# Altium PCB Current Sensor.PcbDoc
Units mil, origin at the board's own origin, x right, y up, seen from the top; angles counter-clockwise.
Board outline 1331 x 1211.8 mil, 4 copper layers (Top Layer, GND, 5V, Bottom Layer), stack 26.556 mil thick; 31 components, 12 nets, 73 pads, 40 vias.
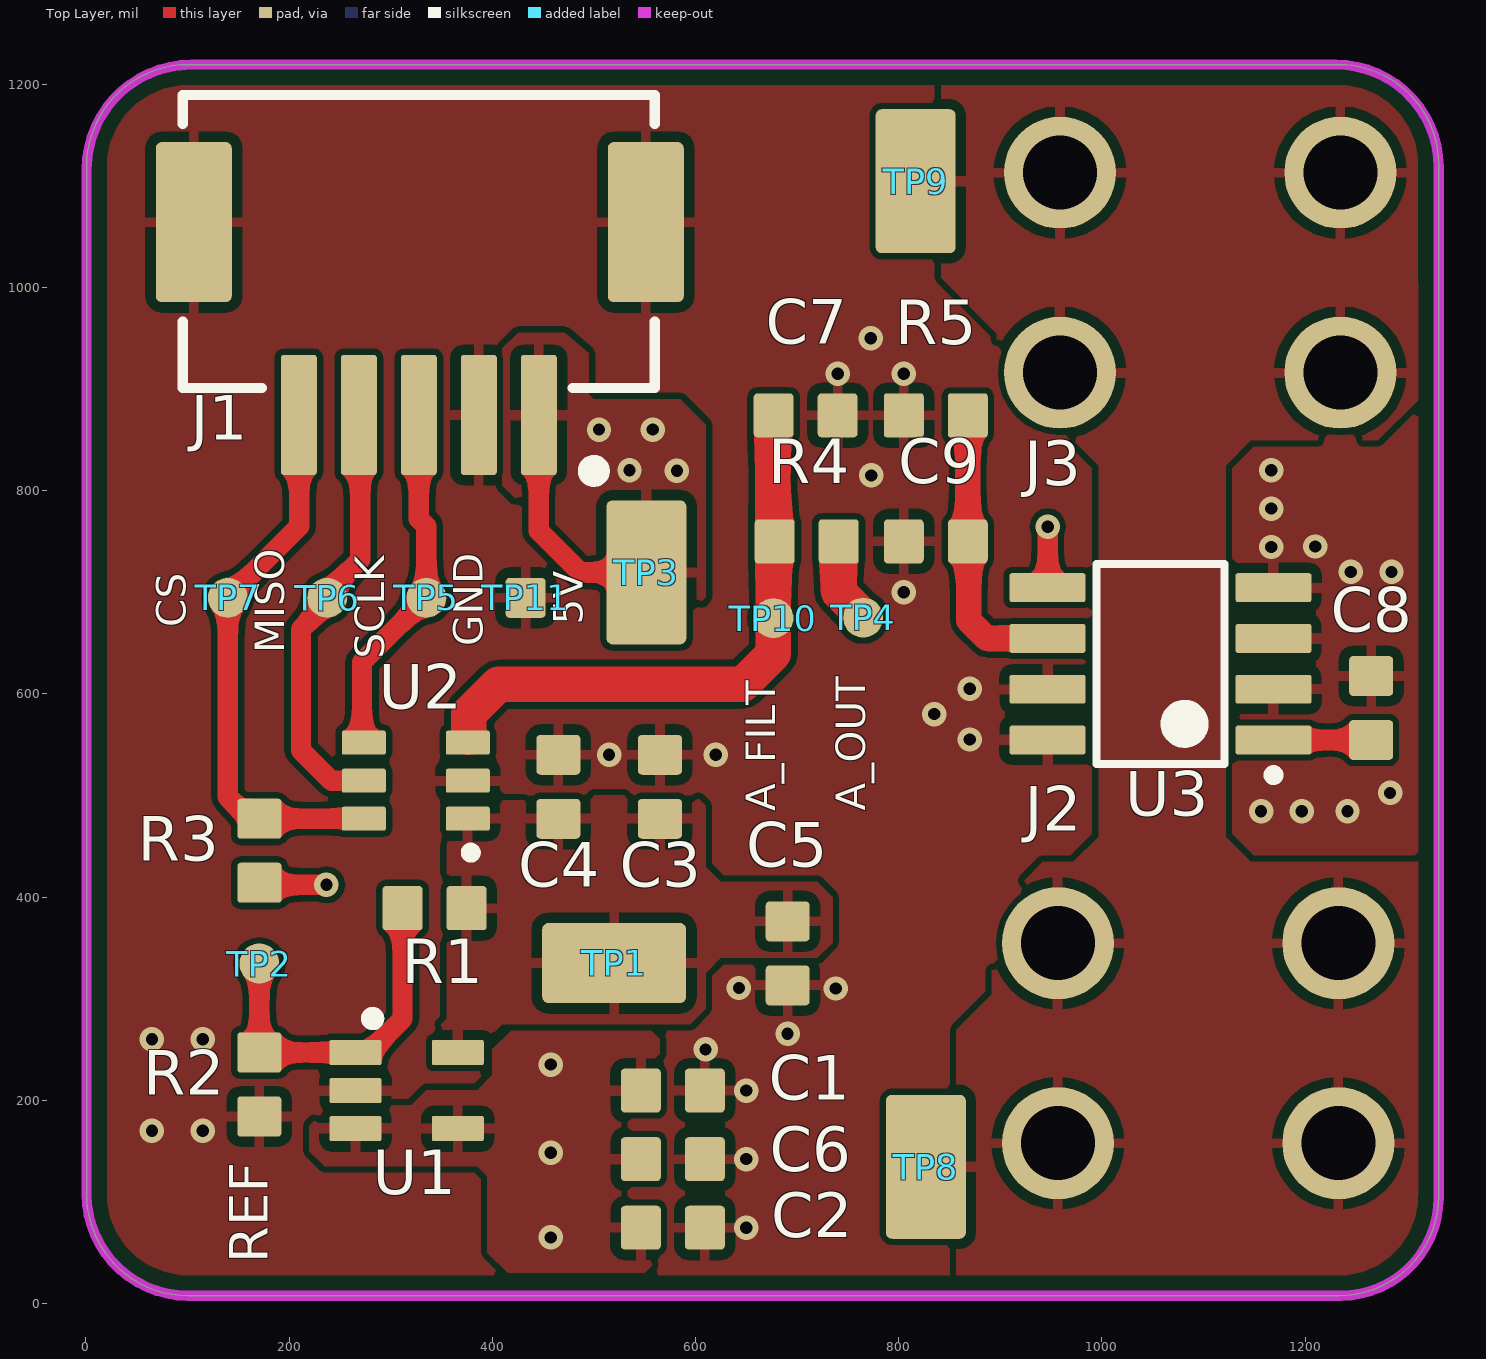
[diagram p0: Top Layer view]
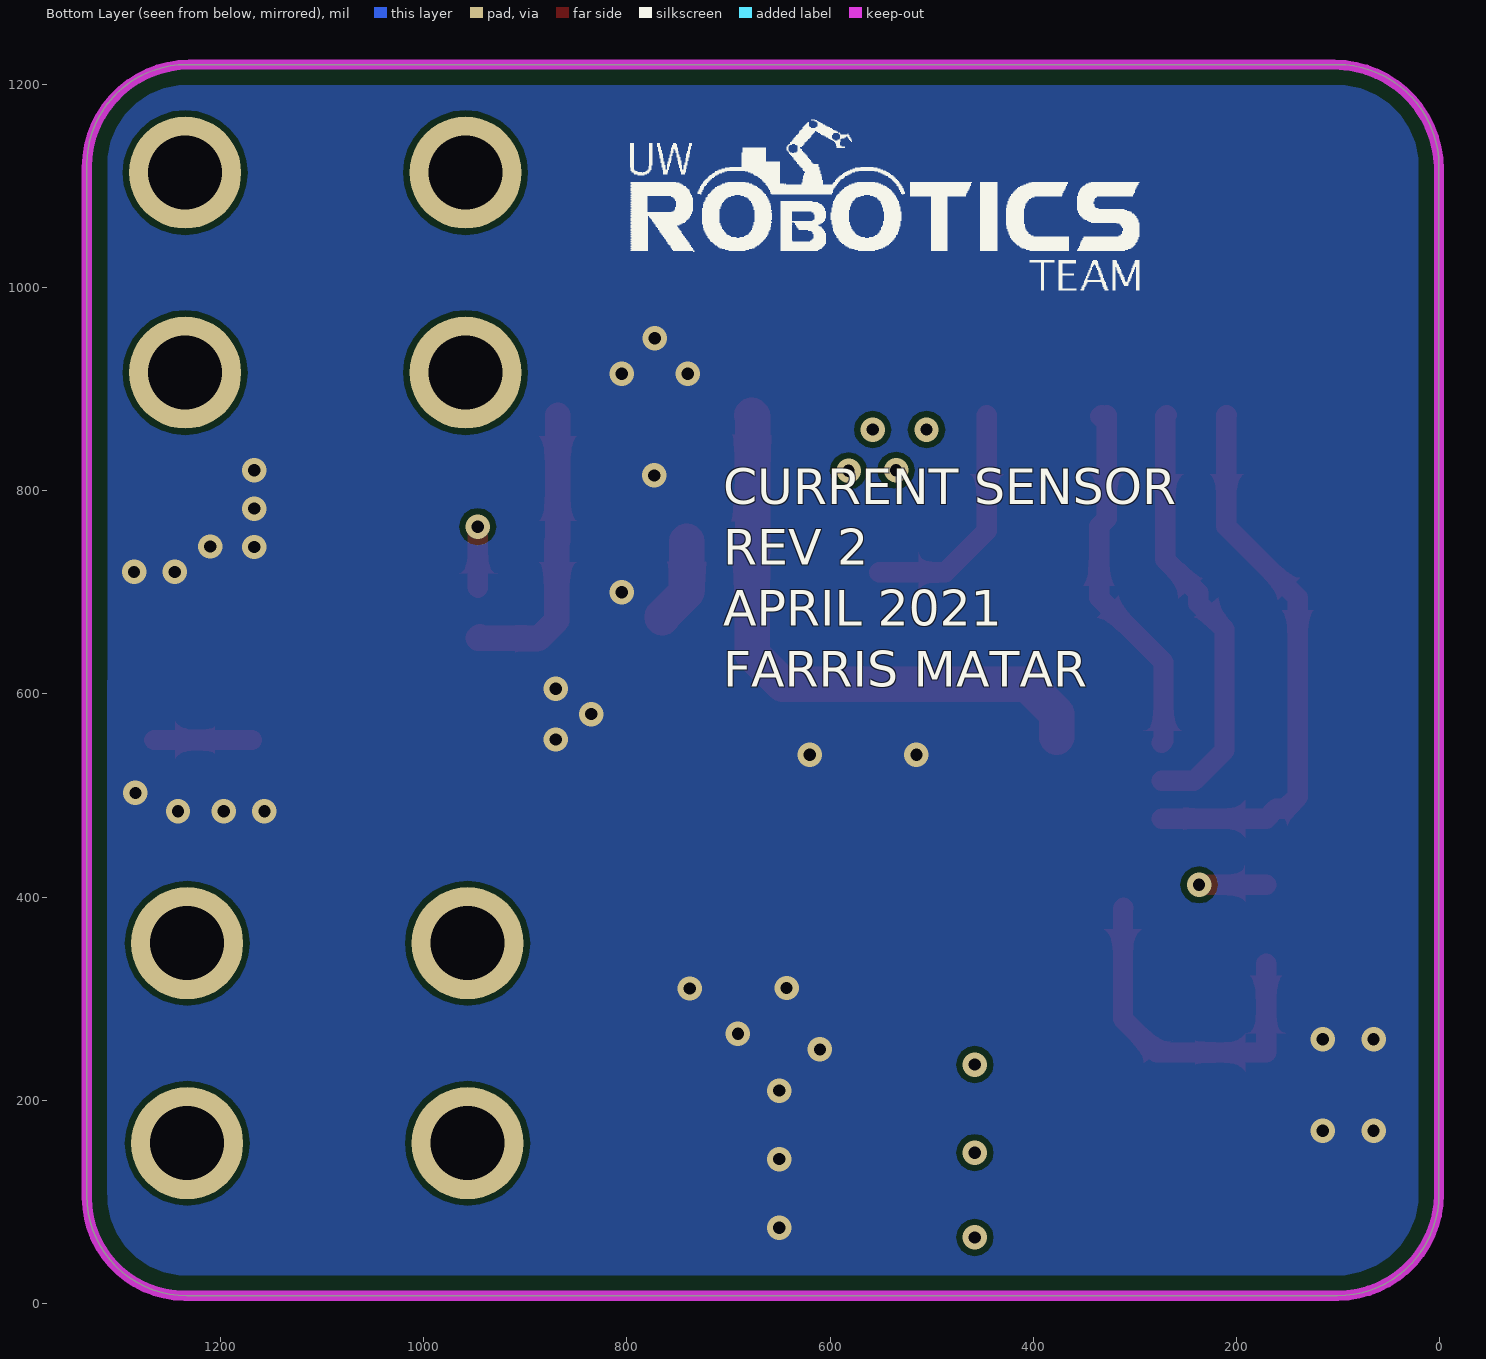
[diagram p1: Bottom Layer view, seen from below]
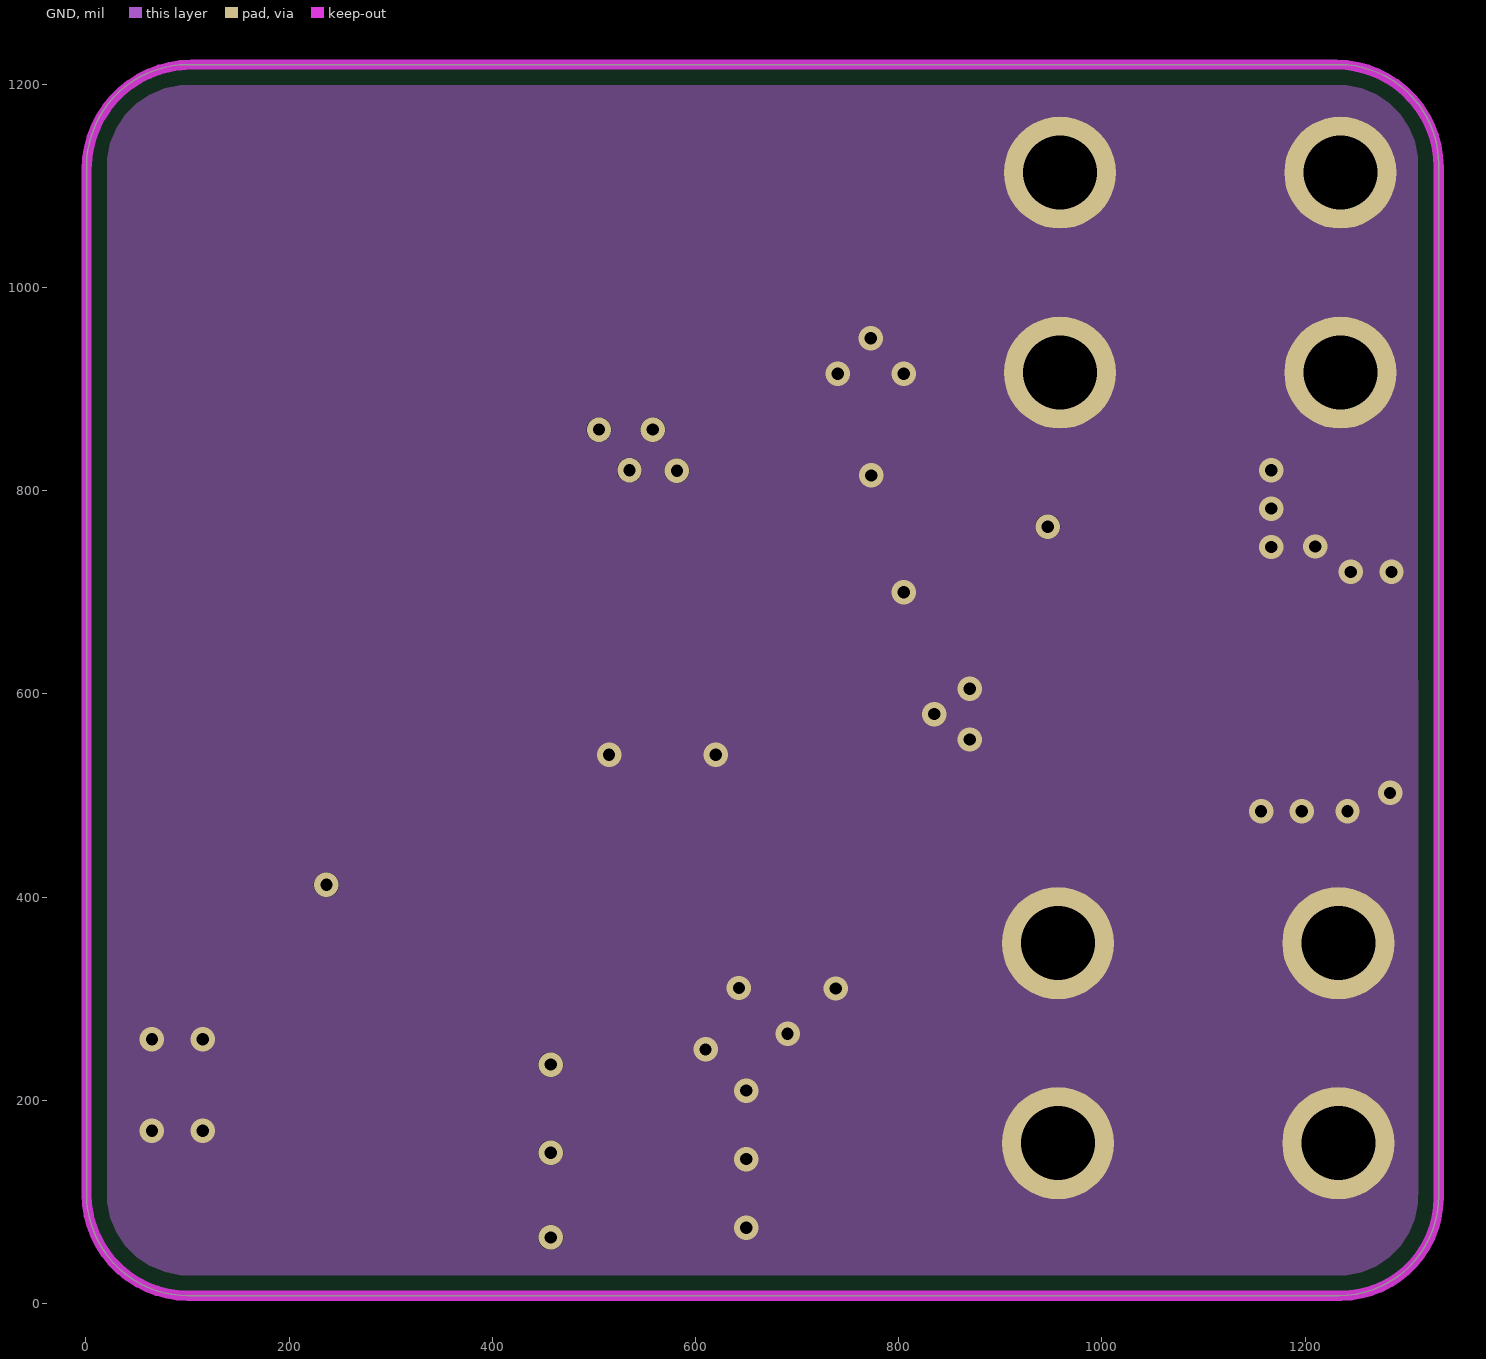
[diagram p2: GND]
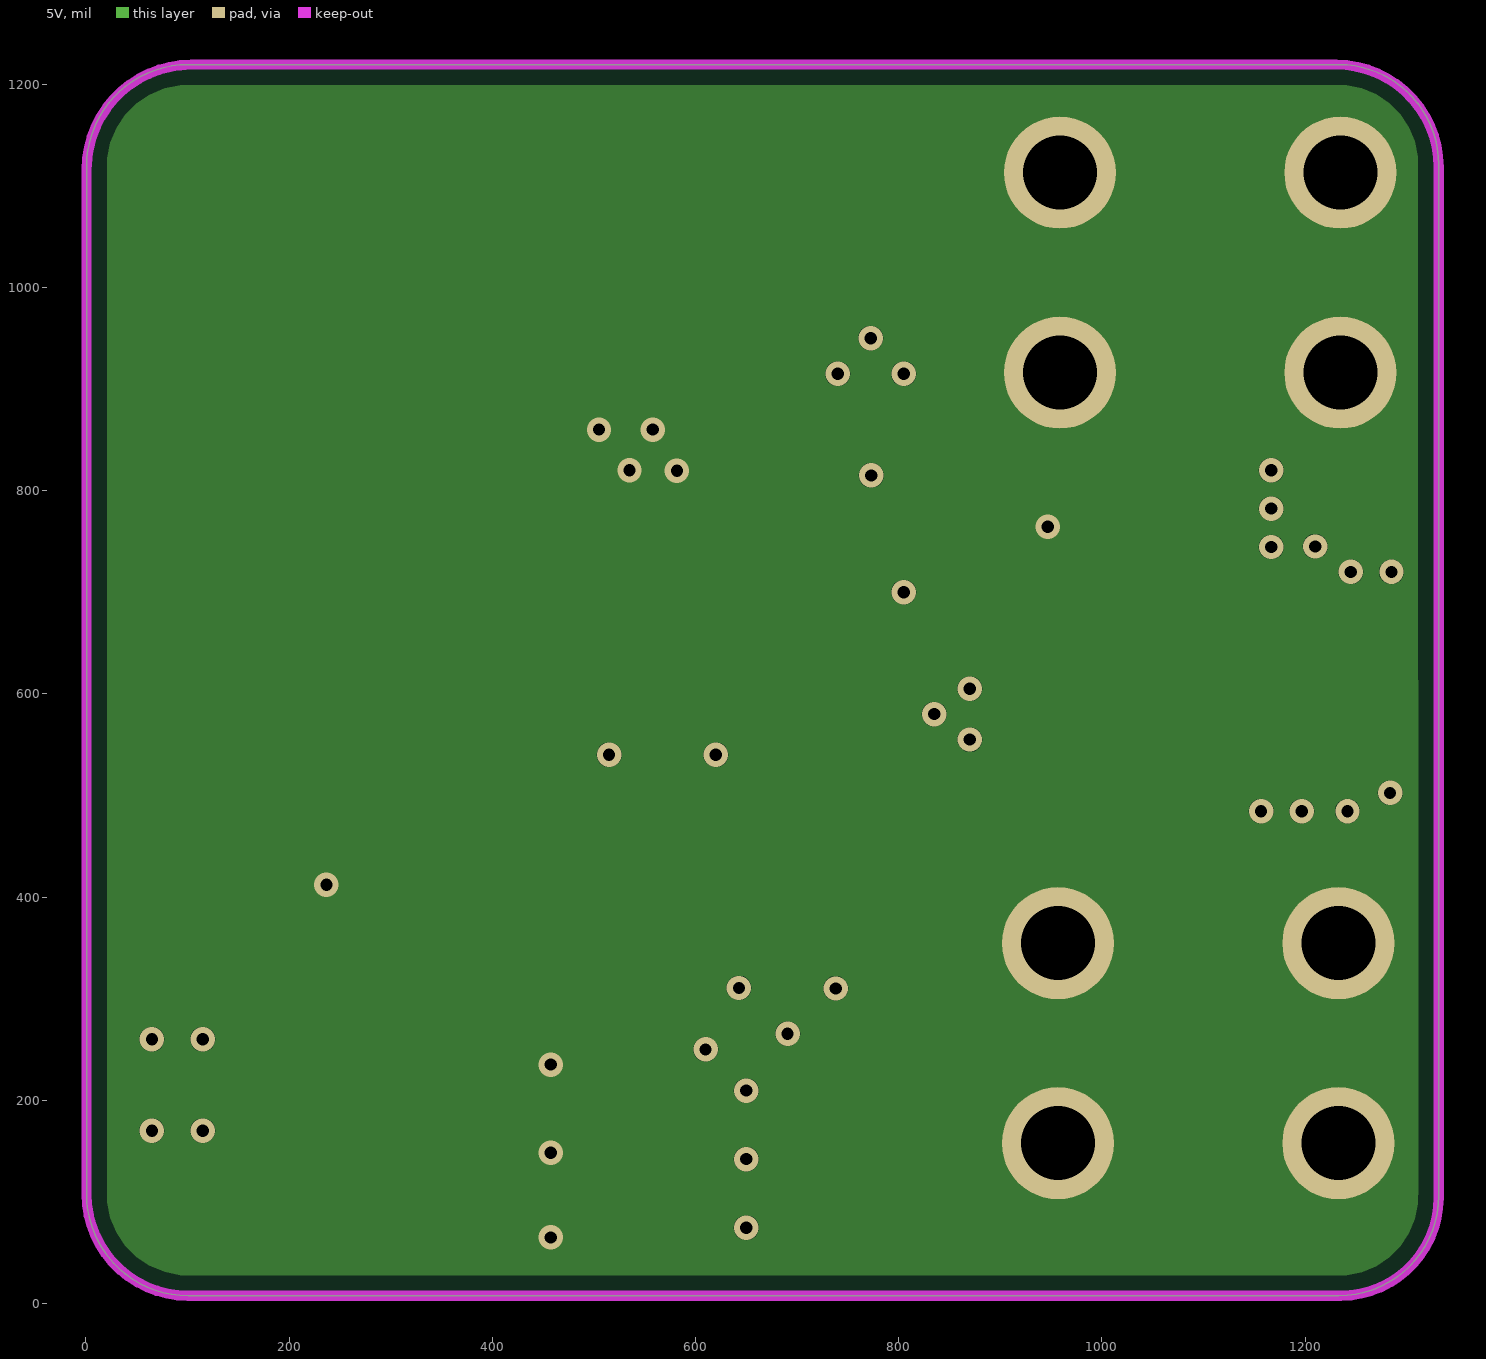
[diagram p3: 5V]
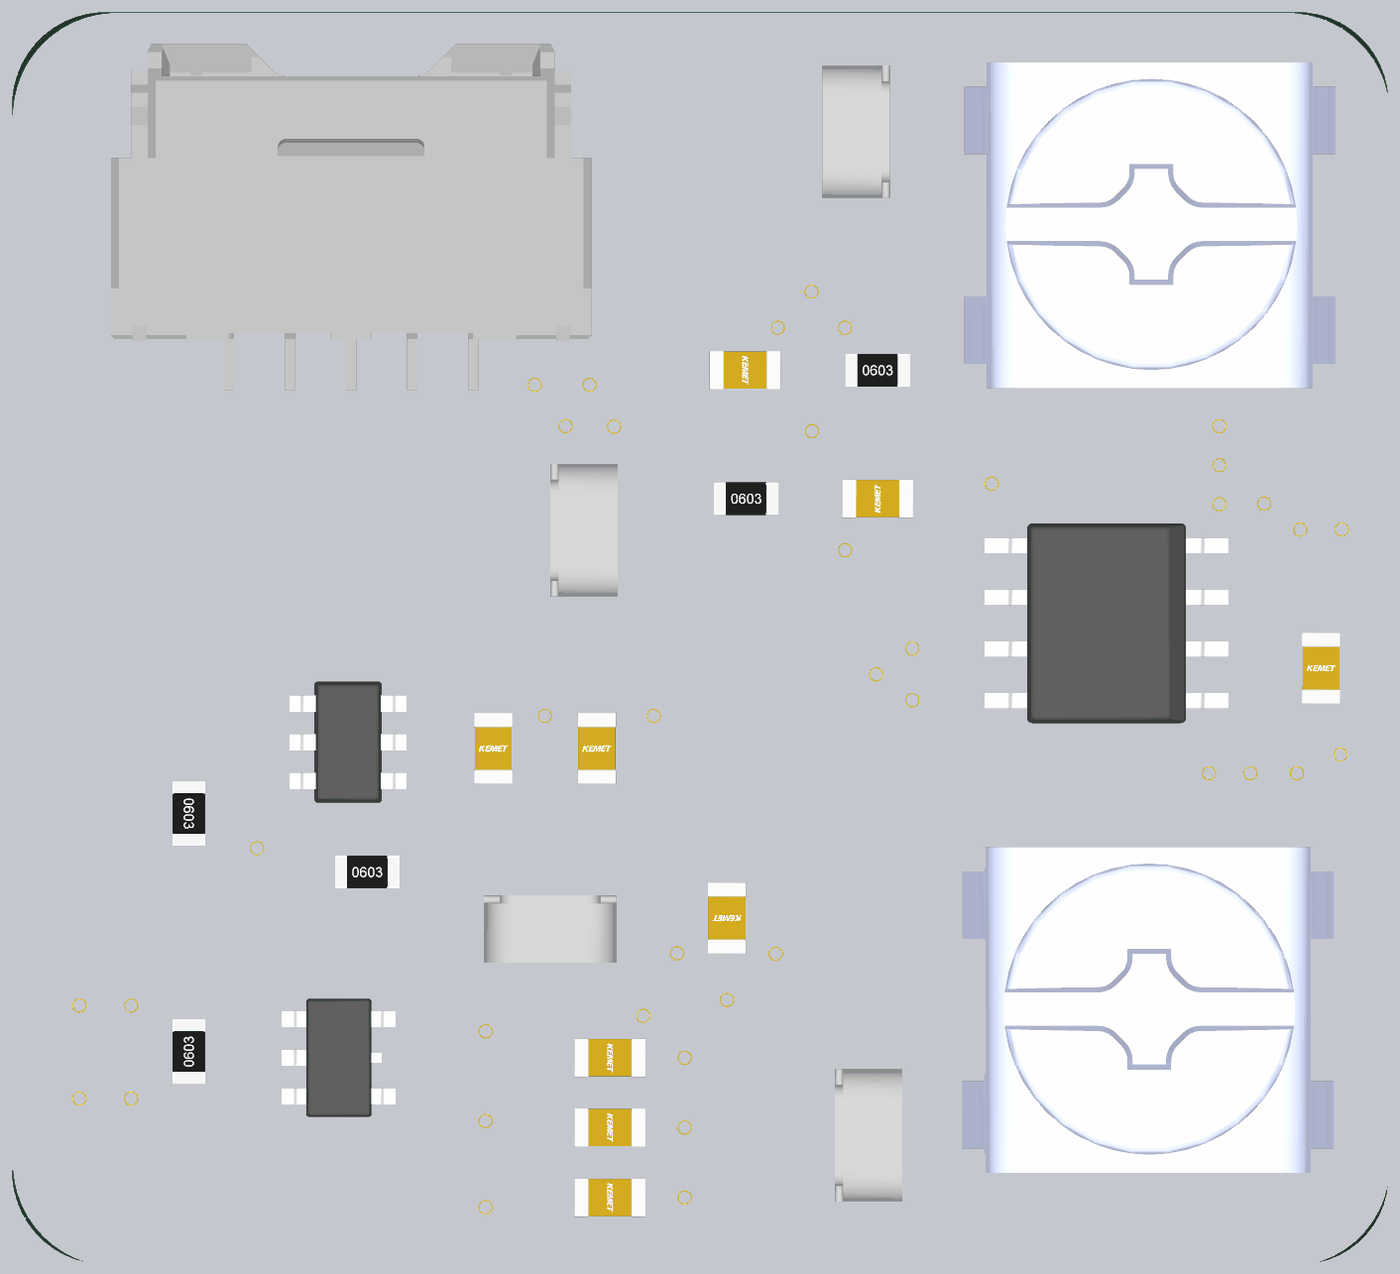
[diagram p4: 3D render of the assembled board from above, using the file's embedded part models]

## Layer stack, top to bottom
Top Solder: solder mask 0.4, Solder Resist, Dk 3.5
Top Layer: signal copper 2.8
Dielectric 2: prepreg 2.8, PP-006, Dk 4.1
GND: signal copper 1.378
Dielectric 1: dielectric 12.6, FR-4, Dk 4.8
5V: signal copper 1.378
Dielectric 3: prepreg 2.8, PP-006, Dk 4.1
Bottom Layer: signal copper 2.8
Bottom Solder: solder mask 0.4, Solder Resist, Dk 3.5

## Board outline
101.71,1219.29 100.71,1219.29 ccw(c100.71,1119.29) 0.71,1119.29 0.71,107.49 ccw(c100.71,107.49) 100.71,7.49 101.71,7.49 1233.09,7.49 ccw(c1233.09,105.91) 1331.51,105.91 1331.71,104.49 1331.51,1120.86 ccw(c1233.09,1120.87) 1233.09,1219.29

## Design rules (kind name [scope] priority, off if disabled: settings)
BoardOutlineClearance [All] p1: gap=20 ignorepadtopadclearanceinfootprint=FALSE
Clearance "current clearance" [InNet('Current sense line')] p1: gap=15 ignorepadtopadclearanceinfootprint=TRUE
Clearance Clearance_1 [All] p2: gap=6 ignorepadtopadclearanceinfootprint=TRUE
HoleSize [All] p1: absolutevalues=TRUE maxlimit=200 minlimit=1 maxpercent=80.000 minpercent=20.000
MinimumSolderMaskSliver [All] p1: minsoldermaskwidth=6
PolygonConnect "High current" [InNet('Current sense line')] p1: connectstyle=Direct reliefconductorwidth=10 reliefentries=4 polygonreliefangle="90 Angle" airgapwidth=10
PolygonConnect [All] p2: thpad.connectstyle=Relief thpad.reliefconductorwidth=10 thpad.reliefentries=4 thpad.polygonreliefangle="90 Angle" thpad.airgapwidth=10 smdpad.connectstyle=Relief smdpad.reliefconductorwidth=10 smdpad.reliefentries=4 smdpad.polygonreliefangle="90 Angle" smdpad.airgapwidth=10 via.connectstyle=Direct via.reliefconductorwidth=10 via.reliefentries=4 via.polygonreliefangle="90 Angle" via.airgapwidth=10
RoomDefinition "Current Sensor" [InComponentClass('Current Sensor')] p1: confinementstyle=ConfineIn formatcopy=TRUE lockcomponents=FALSE outline 1336.71,4.49 1336.71,1224.49 0.71,1224.49 0.71,4.49
RoutingVias [All] p1: holewidth=12 width=24 viastyle="Through Hole" minholewidth=12 minwidth=24 maxholewidth=28 maxwidth=50
SilkToSolderMaskClearance [IsPad] p1: minsilkscreentomaskgap=6 clearancetoexposedcopper=TRUE
SolderMaskExpansion [All] p1: expansion=4 istentingtop=FALSE
Width [All] p1: maxlimit=50 minlimit=6 preferedwidth=6 midlayer1_maxwidth=10 midlayer2_maxwidth=10 minimp=50.000000 maximp=50.000000 favimp=50.000000
27 further rules are at their usual default settings.

## Components (designator, comment, footprint, x,y, rotation, side; value= is the part's Value field where it differs from the comment)
C1 "CAP_1uF_50V_0603" CAP0603 577.71,209.49 r180 top value=1μF
C2 "CAP_0.1uF_50V_0603" CAP0603 577.71,74.49 r180 top value=0.1μF
C3 "CAP_1uF_50V_0603" CAP0603 565,508.5 r270 top value=1μF
C4 "CAP_0.1uF_50V_0603" CAP0603 465,508.5 r270 top value=0.1μF
C5 "CAP_0.1uF_50V_0603" CAP0603 690.71,344.49 r90 top value=0.1μF
C6 "CAP_0.1uF_50V_0603" CAP0603 577.71,141.99 r180 top value=0.1μF
C7 "CAP_0.1uF_50V_0603" CAP0603 708.48,874.1 r180 top value=0.1μF
C8 "CAP_0.1uF_50V_0603" CAP0603 1265,586 r270 top value=0.1μF
C9 "CAP_0.01uF_100V_0603" CAP0603 836.5,750 r0 top value=0.01μF
J1 "CON_5M_SM_RA" MOLEX-5025850570 445.77,874.49 r0 top
J2 "SCREW_TERMINAL_1_POS_6_32" 7701_KEYSTONE 1094.7,256.06 r90 top
J3 "SCREW_TERMINAL_1_POS_6_32" 7701_KEYSTONE 1096.71,1014.49 r90 top
R1 "RES_4.87kΩ_0603_1%" RES0603 311.71,389.01 r0 top value=4.87kΩ
R2 "RES_1.6kΩ_0603_1%" RES0603 170.71,183.97 r90 top value=1.6kΩ
R3 "RES_4.87kΩ_0603_1%" RES0603 170.77,477.03 r270 top value=4.87kΩ
R4 "RES_1.6kΩ_0603_1%" RES0603 678.01,749.96 r0 top value=1.6kΩ
R5 "RES_6.04kΩ_0603_1%" RES0603 805,874.1 r0 top value=6.04kΩ
TP1 "TESTPOINT_SMD_LOOP" S1751-46R 520,335 r0 top
TP2 "TESTPOINT_1MM_CIRCLE" TESTPOINT_CIRCLE_1MM 170.71,334.49 r90 top
TP3 "TESTPOINT_SMD_LOOP" S1751-46R 551.71,719.49 r90 top
TP4 "TESTPOINT_1MM_CIRCLE" TESTPOINT_CIRCLE_1MM 765,675 r90 top
TP5 "TESTPOINT_1MM_CIRCLE" TESTPOINT_CIRCLE_1MM 335.12,694.49 r90 top
TP6 "TESTPOINT_1MM_CIRCLE" TESTPOINT_CIRCLE_1MM 237.42,694.49 r90 top
TP7 "TESTPOINT_1MM_CIRCLE" TESTPOINT_CIRCLE_1MM 139.71,694.49 r90 top
TP8 "TESTPOINT_SMD_LOOP" S1751-46R 826.71,134.49 r90 top
TP9 "TESTPOINT_SMD_LOOP" S1751-46R 816.71,1104.49 r270 top
TP10 "TESTPOINT_1MM_CIRCLE" TESTPOINT_CIRCLE_1MM 676.71,674.49 r90 top
TP11 "TESTPOINT_1MM_SQUARE" TESTPOINT_SQUARE_1MM 432.82,694.49 r90 top
U1 "MAX6037CAUKADJ+T" SOT23-5 315.71,209.49 r0 top
U2 "ADCS7476AIMF/NOPB" ADCS747x 324.71,514.49 r180 top
U3 "MLX91208LDC-CAL-000-TU" 8-SOIC_M 1057.71,629.49 r180 top

## Footprints (in the part's own frame and the unit in brackets; to place one, negate y for a bottom-side part, rotate by r counter-clockwise, add the part's x,y. Pads: shape width x height; smd on the part's side, far side on the other; paste and mask are expansions set on the pad)
8-SOIC_M [mm] "SOIC, 8-Leads, Body 5x4mm, Pitch 1.27mm, IPC Low Density"
  rrect15% 1.9x0.72 smd: 1(-2.825,1.905) 2(-2.825,0.635) 3(-2.825,-0.635) 4(-2.825,-1.905) 5(2.825,-1.905) 6(2.825,-0.635) 7(2.825,0.635) 8(2.825,1.905)
  silkscreen extent -2.95,-2.5 1.6,2.9, body extent -3,-2.45 3,2.45, height 1.63
7701_KEYSTONE [mm] "Through hole screw terminal footprint"
  round 2.8 hole 1.85: 1(-2.5,3.505) 1(-2.5,-3.505) 1(2.5,3.505) 1(2.5,-3.505)
  body extent -4.01,-4.64 3.99,4.49, height 8.2
ADCS747x [mm] "sot-23-6"
  rrect17% 1.1x0.6 smd: 1(-1.3,0.95) 2(-1.3,0) 3(-1.3,-0.95) 4(1.3,-0.95) 5(1.3,0) 6(1.3,0.95)
  silkscreen extent -1.5,1.68 -1.25,1.92, body extent -1.43,-1.48 1.43,1.49, height 0.9
CAP0603 [mm]
  rrect20% 1x1.1 smd: 1(-0.8,0) 2(0.8,0)
  body extent -0.87,-0.48 0.88,0.48, height 0.87
MOLEX-5025850570 [mm]
  rrect15% 1.9x4 smd: 0(-8.625,4.82) 0(2.675,4.82)
  rrect15% 0.9x3 smd: 1(0,0) 2(-1.5,0) 3(-3,0) 4(-4.5,0) 5(-6,0)
  silkscreen extent -8.9,-1.6 2.9,8, body extent -8.9,-0.5 2.9,8, height 6.21
RES0603 [mm] "Chip Resistor, Body 1.6x0.8mm, IPC Medium Density"
  rrect15% 1x1.1 smd: 1(0,0) 2(1.6,0)
  body extent 0,-0.4 1.6,0.4, height 0.46
S1751-46R [mm] "SMD LOOP TESTPOINT"
  rrect15% 3.6x2 smd: 1(0,0)
  body extent -1.63,-0.85 1.62,0.8, height 2.01
SOT23-5 [mm]
  rrect15% 1.3x0.63 smd: 1(-1.279,0.95) 2(-1.279,0) 3(-1.279,-0.95) 4(1.279,-0.95) 5(1.279,0.95)
  silkscreen extent -0.99,1.66 -0.71,1.94, body extent -1.4,-1.45 1.4,1.45, height 1.2
TESTPOINT_CIRCLE_1MM [mm]
  round 1 smd: 1(0,0)
TESTPOINT_SQUARE_1MM [mm]
  rrect20% 1x1 smd: 1(0,0)

## Part data
C1 C3: "CAP CER 1UF 50V X6S 0603", Dielectric=X6S, Manufacturer 1="TDK Corporation", Manufacturer Part Number 1=C1608X6S1H105K080AC, Supplier Part Number 1=445-7424-1-ND, Voltage Rating=50V, Supplier 1=Digi-Key
C2 C4 C5 C6 C7 C8: "CAP CER 0.1UF 50V X7R 0603", Dielectric=X7R, Manufacturer 1=Yageo, Manufacturer Part Number 1=CC0603KRX7R9BB104, Package/Footprint=0603, Supplier Part Number 1=311-1344-1-ND, Voltage Rating=50V, Mounting Type=SMD, Supplier 1=Digi-Key
C9: "CAP CER 10000PF 100V X7R 0603", Dielectric=X7R, Manufacturer 1="Murata Electronics", Manufacturer Part Number 1=GCM188R72A103KA37J, Supplier Part Number 1=490-8028-1-ND, Voltage Rating=100V, Supplier 1=Digi-Key
J1: "CONN HEADER SMD RIGHT ANGLE 1.5MM PITCH", Current Rating=2A, Manufacturer 1=Molex, Manufacturer Part Number 1=5025850570, Package/Footprint=SMD, Supplier Part Number 1=WM14469CT-ND, Family=CLIK-Mate, Mounting Type=SMD, Orientation="Right Angle", Supplier 1=Digi-Key
J2 J3: "TERM W/ASSEMBLD SCREW VERT PCMNT", Manufacturer 1="Keystone Electronics", Manufacturer Part Number 1=7701, Max Current Rating=15A, Package/Footprint=TH, Supplier Part Number 1=36-7701-ND, Mounting Type=TH, Supplier 1=Digi-Key
R1 R3: "RES 4.87K OHM 1% 1/8W 0603", Manufacturer 1="Stackpole Electronics Inc", Manufacturer Part Number 1=RNCP0603FTD4K87, Package/Footprint=0603, Supplier Part Number 1=RNCP0603FTD4K87CT-ND, Mounting Type=SMD, Supplier 1=Digi-Key
R2 R4: "RES 1.6K OHM 1% 1/4W 0603", Manufacturer 1=Panasonic, Manufacturer Part Number 1=ERJ-PA3F1601V, Package/Footprint=0603, Supplier Part Number 1=P1.6KBYCT-ND, Mounting Type=SMD, Supplier 1=Digi-Key
R5: "RES 6.04K OHM 1% 1/10W 0603", Manufacturer 1="Stackpole Electronics Inc", Manufacturer Part Number 1=RMCF0603FT6R04, Package/Footprint=0603, Mounting Type=SMD, Supplier 1=Digi-Key, Supplier Part Number 1="Stackpole Electronics Inc"
TP1 TP3 TP8 TP9: "PC TEST POINT SMD", Manufacturer 1=Harwin, Manufacturer Part Number 1=S1751-46R, Package/Footprint=SMD, Supplier Part Number 1=952-1478-1-ND, Mounting Type=SMD, Supplier 1=Digi-Key
TP2 TP4 TP5 TP6 TP7 TP10: "TESTPOINT 1MM CIRCLE"
TP11: "TESTPOINT 1MM SQUARE"
U1: "IC VREF SERIES 5V 0.5% SOT23-5", Manufacturer 1=Maxim, Max Input Voltage=6V, Max Operating Temperature=125°C, Max Output Current=5mA, Max Output Voltage=5V, Min Operating Temperature=-40°C, Min Output Voltage=1.184V, Operating Supply Current=250uA, Package Quantity=2500, Package/Footprint=SOT-23-5, Supplier Part Number 1=MAX6037CAUKADJ+TCT-ND, Tolerance=0.5%, Category="Voltage References", Manufacturer Part Number 1=MAX6037CAUKADJ+T, Mounting Type=SMD, Number of Pins=5, Output Current=5mA, Output Type=Adjustable, Output Voltage=5V, Quiescent Current=250uA, Reference Type=Series,Adjustable, Reference Voltage=5V, RoHS=Yes, Supplier 1=Digi-Key
U2: "IC ADC 12BIT SAR SOT23-6", Manufacturer 1="TI National Semiconductor", Max Operating Temperature=125°C, Max Supply Voltage=5.25V, Min Operating Temperature=-40°C, Min Supply Voltage=2.7V, Nominal Supply Current=2mA, Operating Supply Voltage=5V, Package Quantity=1000, Package/Footprint=SOT-23-6, Power Consumption=2mW, Supplier Part Number 1=ADCS7476AIMF/NOPBCT-ND, Category="Analog to Digital Converters (ADCs)", Conversion Rate=1000KS/s, Height=1.02mm, Integral Nonlinearity (INL)=-1.1LSB, Interface=SPI,Serial, Lead Free="Lead Free", Length=2.92mm, Manufacturer Part Number 1=ADCS7476AIMF/NOPB, Mounting Type=SMD, Number of A/D Converters=1, Number of Analog Inputs=1, Number of Bits=12, Number of Channels=1, Number of Converters=1, Number of Elements=1, Number of Inputs=1, Number of Pins=6, Packaging="Tape and Reel", Polarity=Unipolar, Pricing 1="1=3.31000, 10=2.97500, 25=2.81240, 100=2.31250, 250=2.07500, 500=2.00000 (USD)", Radiation Hardening=No, REACH SVHC="No SVHC", Resolution=12b, RoHS=Yes, Sampling Rate=1MS/s, Signal to Noise Ratio (SNR)=72.5dB, Stock 1=18495, Supplier 1=Digi-Key, Width=1.6mm
U3: "SENSOR CURRENT HALL 10MT AC/DC", Frequency=200kHz, Manufacturer 1="Melexis Technologies NV", Package/Footprint=8-SOIC, Supplier Part Number 1=MLX91208LDC-CAL-000-TU-ND, Accuracy=0.1%, Linearity=0.75%, Manufacturer Part Number 1=MLX91208LDC-CAL-000-TU, Mounting Type=SMD, Supplier 1=Digi-Key

## Via types
v1: diameter 24, hole 12, Top Layer to Bottom Layer, tented both sides, 40 vias

## Nets (pads, with @x,y where several pads share a name; then routed paths per layer and width w, separated by ;. In a path a pad name is that pad's centre, name@x,y a point inside that pad or via, vN(x,y) a via of type N, cw(c..) or ccw(c..) an arc to the next point about the centre after c; other vN are vias at no path point)
5V: C1.2 C2.2 C6.2 J1.1 R3.2 TP3.1 U1.3 U1.4 U3.5 | length 363
  Top Layer w20: R3.2@170.77,412.01 v1(236.71,412.01) ; J1.1 445.77,760.43 486.71,719.49 TP3.1 ; U3.5 946.71,704.71 v1(946.71,764.49)
  other v1: 457.5,65 457.5,148.33 457.5,235 581.71,819.49 535,820 505,860 558,860
ADC_IN: C3.2 C4.2 C5.2 R1.2 TP1.1 U1.5 U2.1
ANALOG_FILTERED: C7.2 R4.1 TP10.1 U2.3 | length 582.6
  Top Layer w35: U2.3@376.71,557.49 376.71,580.27 405.92,609.49 646.71,609.49 676.71,639.49 TP10.1 676.71,739.45 676,740.16 676,750 676.22,750.22 676.22,873.33 C7.2
Analog_out: C9.2 R5.2 U3.6 | length 289.5
  Top Layer w25: R5.2 868,759.15 C9.2 869,748.99 869,672.2 886.71,654.49 U3.6 U3.6@944.82,656.16
CURRENT_SENSE_LINE: J2.1 J3.1 TP8.1 TP9.1
GND: C1.1 C2.1 C3.1 C4.1 C5.1 C6.1 C7.1 C8.1 C9.1 J1.0 J1.2 R2.1 R5.1 TP11.1 U1.2 U2.2 U3.2 U3.3 U3.4 U3.7 U3.8
  other v1: 650,74.49 650,141.99 65,170 115,170 650,209.49 610,250 65,260 115,260 690.71,265.49 642.71,310.49 738,310 1156.71,484.49 1196.71,484.49 1241.71,484.49 1283.71,502.49 515,540 620,540 870,555 835,580 870,605 805,700 1245,720 1285,720 1166.71,744.49 1210,745 1166.71,782.24 773,815 1166.71,820 740,915 805,915 772.5,950
NetC8_2: C8.2 U3.1 | length 96.1
  Top Layer w20: U3.1 C8.2
NetJ1_3: J1.3 TP5.1 U2.4 | length 359.8
  Top Layer w20: U2.4 271.71,553.7 271.71,631.08 TP5.1 335.12,764.88 327.66,772.34 J1.3 J1.3@331.41,870.73 ; J1.3@332.66,874.49 J1.3@333.89,873.25
NetJ1_4: J1.4 TP6.1 U2.5 | length 429
  Top Layer w20: J1.4 270,873.09 270,732.17 237.42,699.58 TP6.1 237.42,689.24 211.71,663.54 211.71,544.49 241.71,514.49 U2.5
NetJ1_5: J1.5 R3.1 TP7.1 U2.6 | length 548.1
  Top Layer w20: J1.5 210,874.03 210,764.78 TP7.1 139.71,498.43 151.43,486.71 161.09,486.71 R3.1 170.83,477.09 U2.6
NetR1_1: R1.1 R2.2 TP2.1 U1.1 | length 351.9
  Top Layer w20: TP2.1 R2.2 170.75,246.93 265.32,246.93 U1.1 278.55,246.89 311.71,280.05 311.71,388.53 311.23,389.01 R1.1@311.23,389.49
NetR4_2: R4.2 TP4.1 | length 85
  Top Layer w35: R4.2 R4.2 741,700.18 765,676.18 TP4.1

## Polygon pours and split planes (outlines as drawn)
GND on Top Layer "GND_L01_P033" (solid, pour order 33): -40.29,-75.51 1436.71,-75.51 1436.71,1244.49 1316.71,1364.49 -40.29,1364.49
5V on Top Layer "5V_L01_P021" (solid, pour order 31): 425.39,955.39 471.48,955.39 495,935 495,895 500,890 585,890 610,865 610,695 595,680 510,680 490,700 490,725 410,805 410,940
ADC_IN on Top Layer "ADC_IN_L01_P020" (solid, pour order 26): 355,495 435,495 440,500 600,500 610,490 610,430 625,415 720,415 735,400 735,355 720,340 625,340 610,325 610,290 595,275 410,275 400,265 400,230 390,220 340,220 330,230 330,255 355,280 355,455 350,460 350,490
5V on Top Layer "5V_L01_P022" (solid, pour order 32): 550,275 565,260 565,45 550,30 415,30 395,50 395,125 385,135 235,135 220,150 220,175 240,195 320,195 335,210 385,210 400,225 400,250 425,275
CURRENT_SENSE_LINE on Top Layer "CURRENT_SENSE_LINE_L01_P007" (solid, pour order 7): 856.71,-5.51 856.71,269.49 891.71,304.49 891.71,384.49 941.71,434.49 971.71,434.49 996.71,459.49 996.71,824.49 971.71,849.49 936.71,849.49 896.71,889.49 896.71,954.49 841.71,1009.49 841.71,1259.49 1361.71,1259.49 1366.71,1264.49 1366.71,934.49 1356.71,934.49 1271.71,849.49 1146.71,849.49 1121.71,824.49 1121.71,459.49 1146.71,434.49 1331.71,434.49 1381.71,384.49 1381.71,-5.51
GND on Bottom Layer "GND_L04_P001" (solid, pour order 1): -443.29,-95.51 1456.71,-95.51 1496.71,-55.51 1496.71,1264.49 1416.71,1344.49 -443.29,1344.49
GND on GND "GND_L02_P005" (solid, pour order 5): -423.29,1364.49 -413.29,1354.49 1336.71,1354.49 1476.71,1214.49 1476.71,-75.51 -353.29,-75.51 -423.29,-5.51
5V on 5V "5V_L03_P006" (solid, pour order 6): -423.29,1364.49 1346.71,1364.49 1476.71,1234.49 1476.71,-85.51 -393.29,-85.51 -423.29,-55.51

## Keep-outs
Keep-Out Layer:
  lines w0.25: 0.71,107.49 ccw(c100.71,107.49) 100.71,7.49 ; 0.71,107.49 ccw(c100.71,107.49) 100.71,7.49 ; 0.71,107.49 ccw(c100.71,107.49) 100.71,7.49 ; 0.71,107.49 ccw(c100.71,107.49) 100.71,7.49 ; 0.71,107.49 ccw(c100.71,107.49) 100.71,7.49 ; 0.71,107.49 0.71,1119.29 ; 0.71,107.49 0.71,1119.29 ; 0.71,107.49 0.71,1119.29 ; 0.71,107.49 0.71,1119.29 ; 0.71,107.49 0.71,1119.29 ; 0.71,1119.29 cw(c100.71,1119.29) 100.71,1219.29 ; 0.71,1119.29 cw(c100.71,1119.29) 100.71,1219.29 ; 0.71,1119.29 cw(c100.71,1119.29) 100.71,1219.29 ; 0.71,1119.29 cw(c100.71,1119.29) 100.71,1219.29 ; 0.71,1119.29 cw(c100.71,1119.29) 100.71,1219.29 ; 100.71,7.49 101.71,7.49 ; 100.71,7.49 101.71,7.49 ; 100.71,7.49 101.71,7.49 ; 100.71,7.49 101.71,7.49 ; 100.71,7.49 101.71,7.49 ; 100.71,1219.29 101.71,1219.29 ; 100.71,1219.29 101.71,1219.29 ; 100.71,1219.29 101.71,1219.29 ; 100.71,1219.29 101.71,1219.29 ; 100.71,1219.29 101.71,1219.29 ; 101.71,7.49 1233.09,7.49 ; 101.71,7.49 1233.09,7.49 ; 101.71,7.49 1233.09,7.49 ; 101.71,7.49 1233.09,7.49 ; 101.71,7.49 1233.09,7.49 ; 101.71,1219.29 1233.09,1219.29 ; 101.71,1219.29 1233.09,1219.29 ; 101.71,1219.29 1233.09,1219.29 ; 101.71,1219.29 1233.09,1219.29 ; 101.71,1219.29 1233.09,1219.29 ; 1233.09,7.49 ccw(c1233.09,105.91) 1331.51,105.91 ; 1233.09,7.49 ccw(c1233.09,105.91) 1331.51,105.91 ; 1233.09,7.49 ccw(c1233.09,105.91) 1331.51,105.91 ; 1233.09,7.49 ccw(c1233.09,105.91) 1331.51,105.91 ; 1233.09,7.49 ccw(c1233.09,105.91) 1331.51,105.91 ; 1233.09,1219.29 cw(c1233.09,1120.87) 1331.51,1120.87 ; 1233.09,1219.29 cw(c1233.09,1120.87) 1331.51,1120.87 ; 1233.09,1219.29 cw(c1233.09,1120.87) 1331.51,1120.87 ; 1233.09,1219.29 cw(c1233.09,1120.87) 1331.51,1120.87 ; 1233.09,1219.29 cw(c1233.09,1120.87) 1331.51,1120.87 ; 1331.51,105.91 1331.71,104.49 ; 1331.51,105.91 1331.71,104.49 ; 1331.51,105.91 1331.71,104.49 ; 1331.51,105.91 1331.71,104.49 ; 1331.51,105.91 1331.71,104.49 ; 1331.51,1120.86 1331.71,104.49 ; 1331.51,1120.86 1331.71,104.49 ; 1331.51,1120.86 1331.71,104.49 ; 1331.51,1120.86 1331.71,104.49 ; 1331.51,1120.86 1331.71,104.49
  lines w10: 100.71,7.49 cw(c100.71,107.49) 0.71,107.49 0.71,1115.95 cw(c104.05,1115.95) 104.05,1219.29 1230.36,1219.29 cw(c1230.36,1118.13) 1331.51,1118.13 1331.51,104.13 cw(c1234.87,104.13) 1234.87,7.49 101.71,7.49 ; 101.71,7.49 ccw(c101.71,7.49) 101.71,7.49

## Silkscreen, mask and mechanical layers (free items; w line width, h text height)
Top Overlay:
  text "5V" at 499.01,668.15 h50 r90
  text "CS" at 108.11,665.63 h50 r90
  text "GND" at 400.49,647.04 h50 r90
  text "MISO" at 205.24,639.88 h50 r90
  text "SCLK" at 303.36,634.52 h50 r90
  text "A_OUT" at 776.87,485 h50 r90
  text "A_FILT" at 688.28,484.46 h50 r90
  text "REF" at 191.71,39.49 h65 r90
Bottom Overlay:
  drawing of 16 lines, arcs and shapes, not listed
  text "CURRENT SENSOR / REV 2 / APRIL 2021 / FARRIS MATAR" at 705,595 h60
Board Outline:
  lines w10: 0,100 ccw(c90,100) 90,10 1245,10 ccw(c1245,95) 1330,95 1330,1130 ccw(c1242.5,1132.5) 1245,1220 90,1220 ccw(c90,1130) 0,1130 0,100
Mechanical 4:
  lines w10: -0.5,-472.93 -0.5,-452.93 ; 59.5,-482.93 -0.5,-462.93 ; 59.5,-442.93 -0.5,-462.93 ; 396.02,-462.93 -0.5,-462.93 ; 1177.78,-462.93 1574.3,-462.93 ; 1514.3,-482.93 1574.3,-462.93 ; 1514.3,-442.93 1574.3,-462.93 ; 1574.3,-472.93 1574.3,-452.93 ; 1652.73,-304.5 1672.73,-364.5 ; 1652.73,1150.3 1672.73,1210.3 ; 1662.73,-364.5 1682.73,-364.5 ; 1662.73,1210.3 1682.73,1210.3 ; 1672.73,32.02 1672.73,-364.5 ; 1672.73,813.78 1672.73,1210.3 ; 1692.73,-304.5 1672.73,-364.5 ; 1692.73,1150.3 1672.73,1210.3
  text "1574.803 (mil)" at 1708.72,42.02 h60 r90
  text "1574.803 (mil)" at 406.02,-498.92 h60